# Allegro board RSC-IT-R100-0617.brd
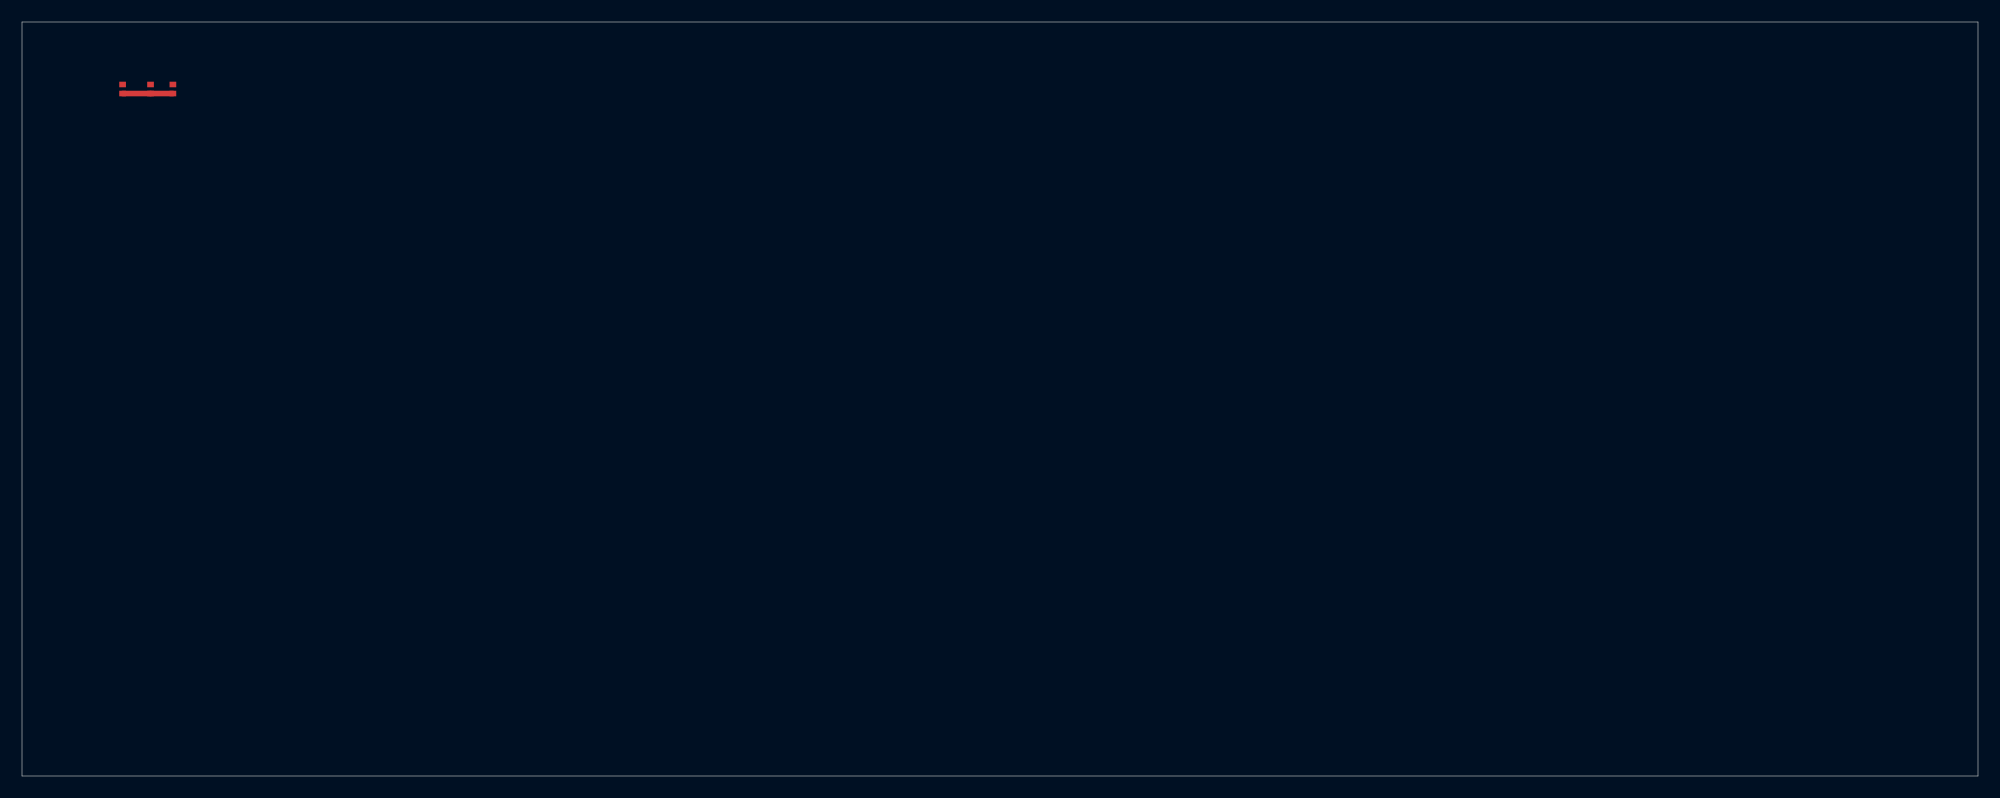
[diagram p0: board, top side]
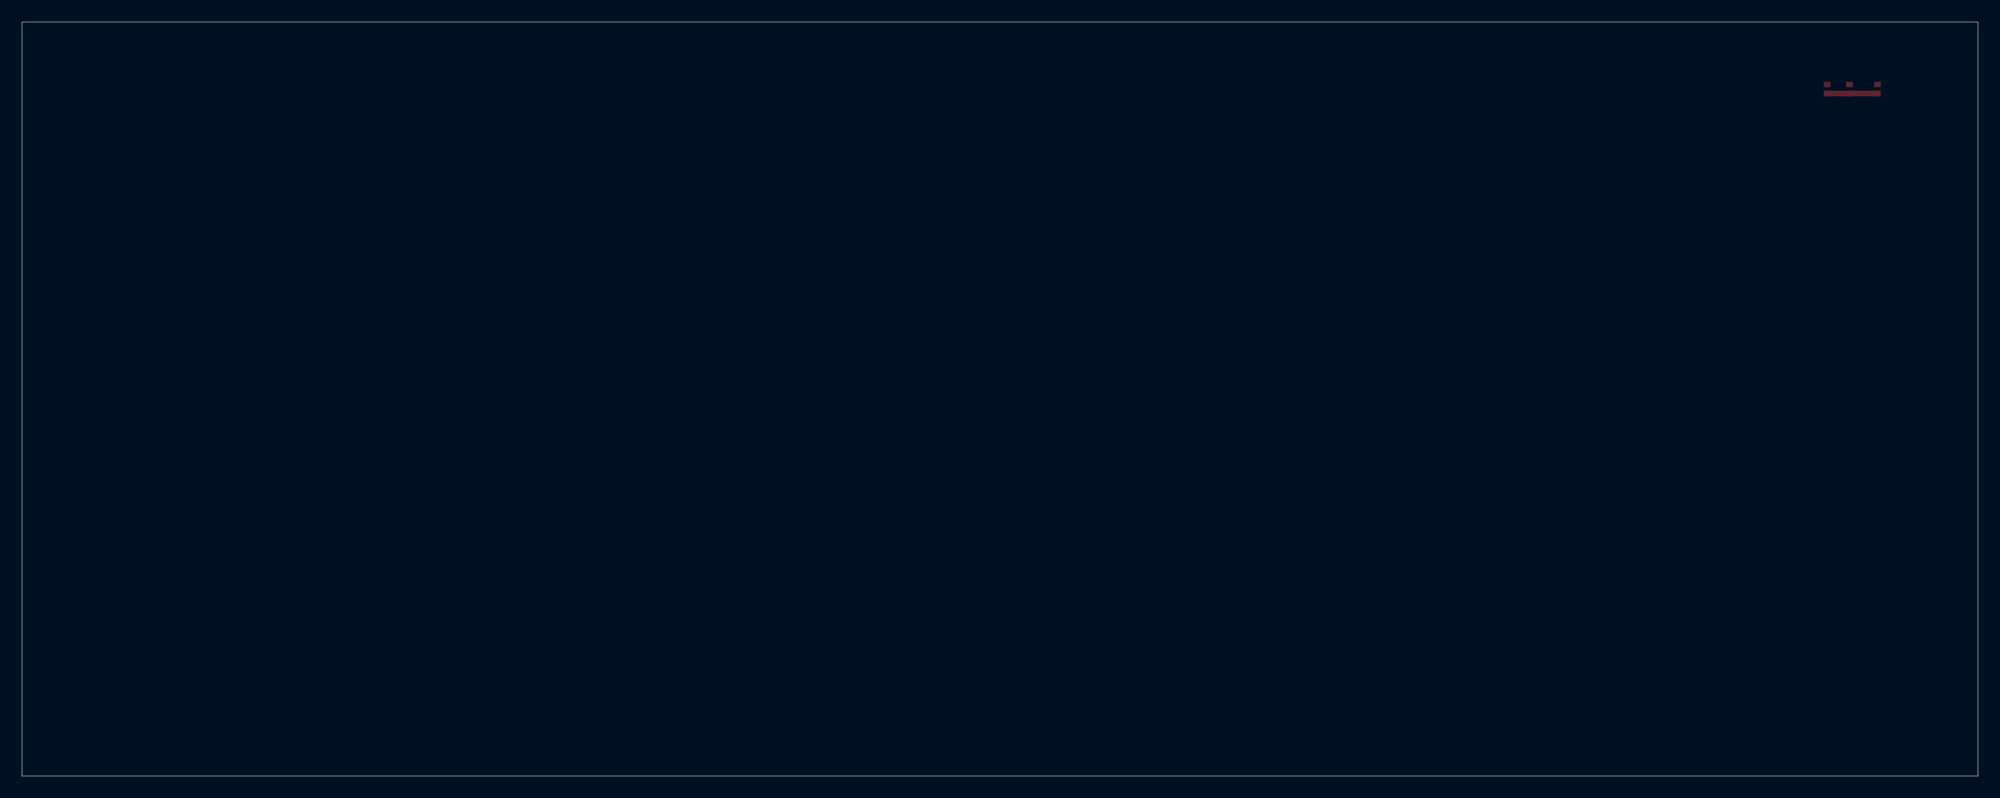
[diagram p1: board, bottom side, seen from below]

Outline 177.8 x 68.58 mm; copper layers: TOP, BOTTOM. Coordinates in mm from the lower left corner of the outline.
Outline path: 0,68.58 177.8,68.58 177.8,0 0,0 0,68.58

## Design rules (mm)
constraint set DEFAULT: min track width 0.127

## Placement (name value [footprint] x y rotation side)
R1  Test  [0402]  9.14 62.48 270 top
R2  Test  [0402]  11.68 62.48 270 top
R3  Test  [0402]  13.72 62.48 270 top

## Library data of the parts
R1-R3 = Test

## Footprints (pads in the part's own frame, mm; a bottom-side part is the same pattern mirrored in y, then rotated)
0402
  rect 0.508x0.61 smd: 1(-0.411,0) 2(0.411,0)

## Nets
GND: R1.2 R2.2 R3.2
P3V3: R2.1
P3V3_STBY: R3.1
P12V: R1.1

## Routing (per net, layer and track width the routed paths; a pad name or vN(x,y) marks a point on that pad's centre or on a via; arc(x,y) is an arc through that point)
GND: length 4.6
  TOP w0.508: R3.2 R2.2 R1.2
